# Altium PCB V2_Slit_Lamp_PCB.PcbDoc (part 1 of 2)
Units mm, origin at the board's own origin, x right, y up, seen from the top; angles counter-clockwise.
Board outline 40 x 62 mm, 2 copper layers (Top, Bottom); 34 components, 34 nets, 166 pads, 7 vias.
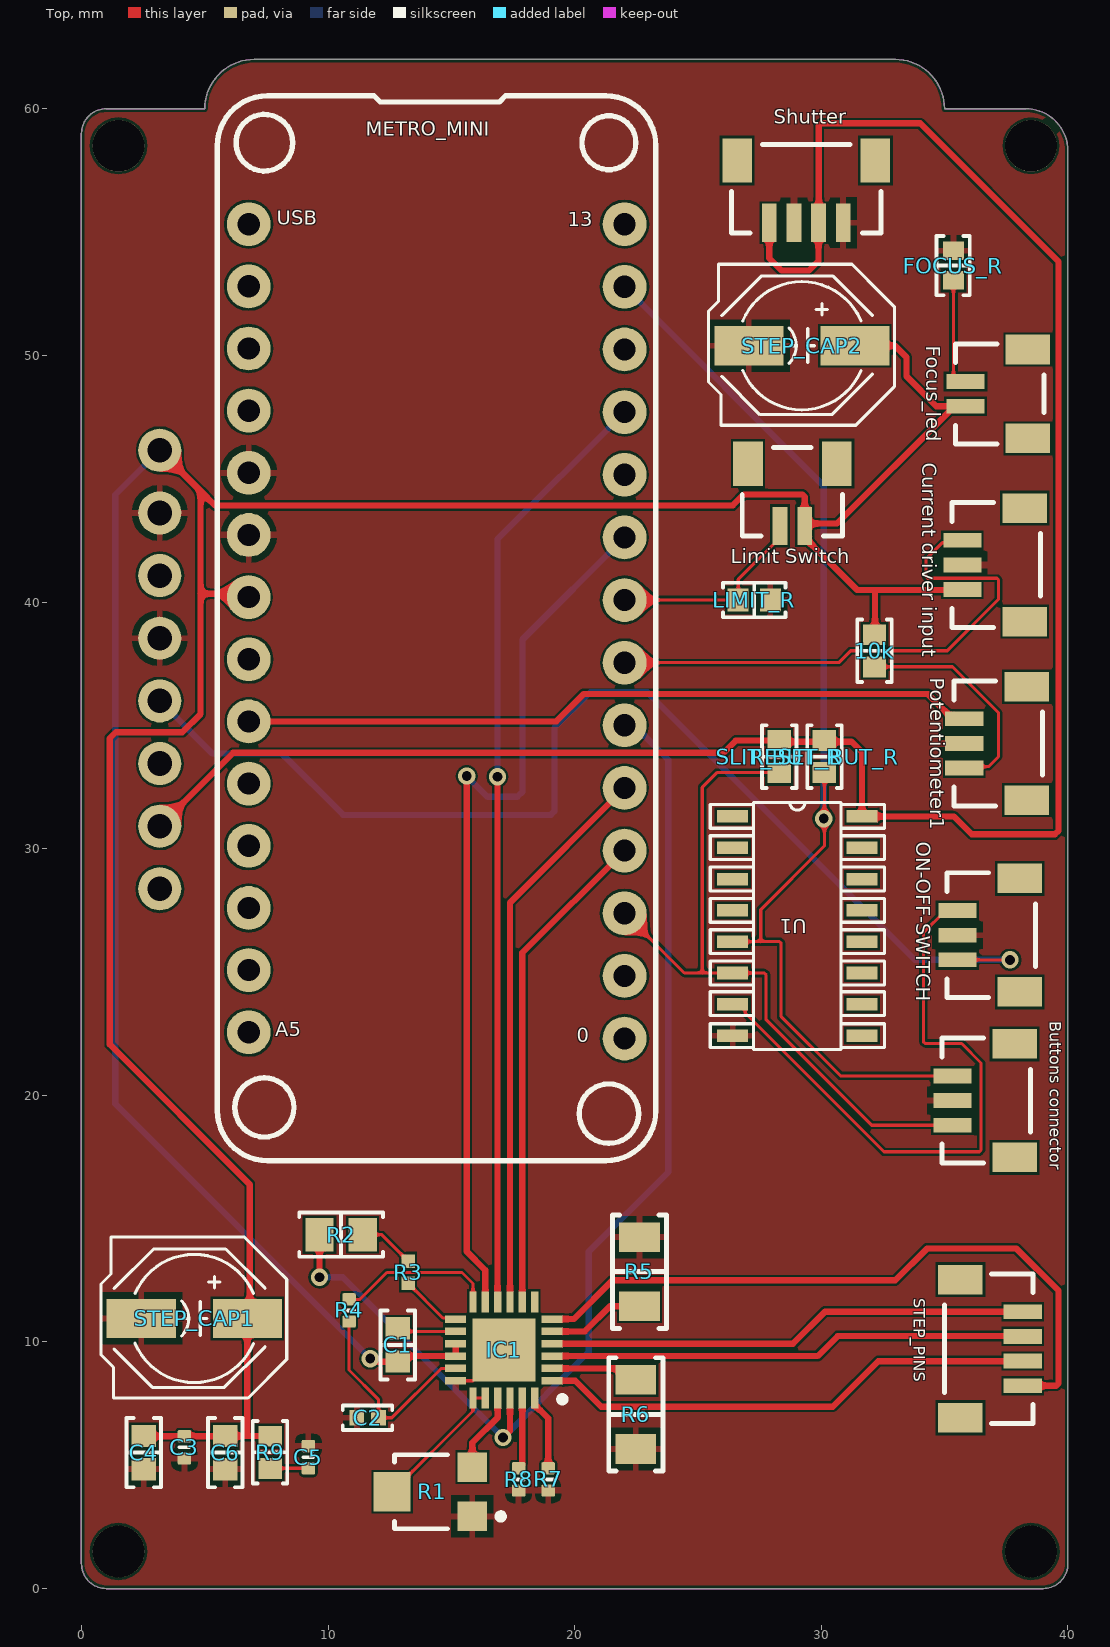
[diagram p0: Top view]
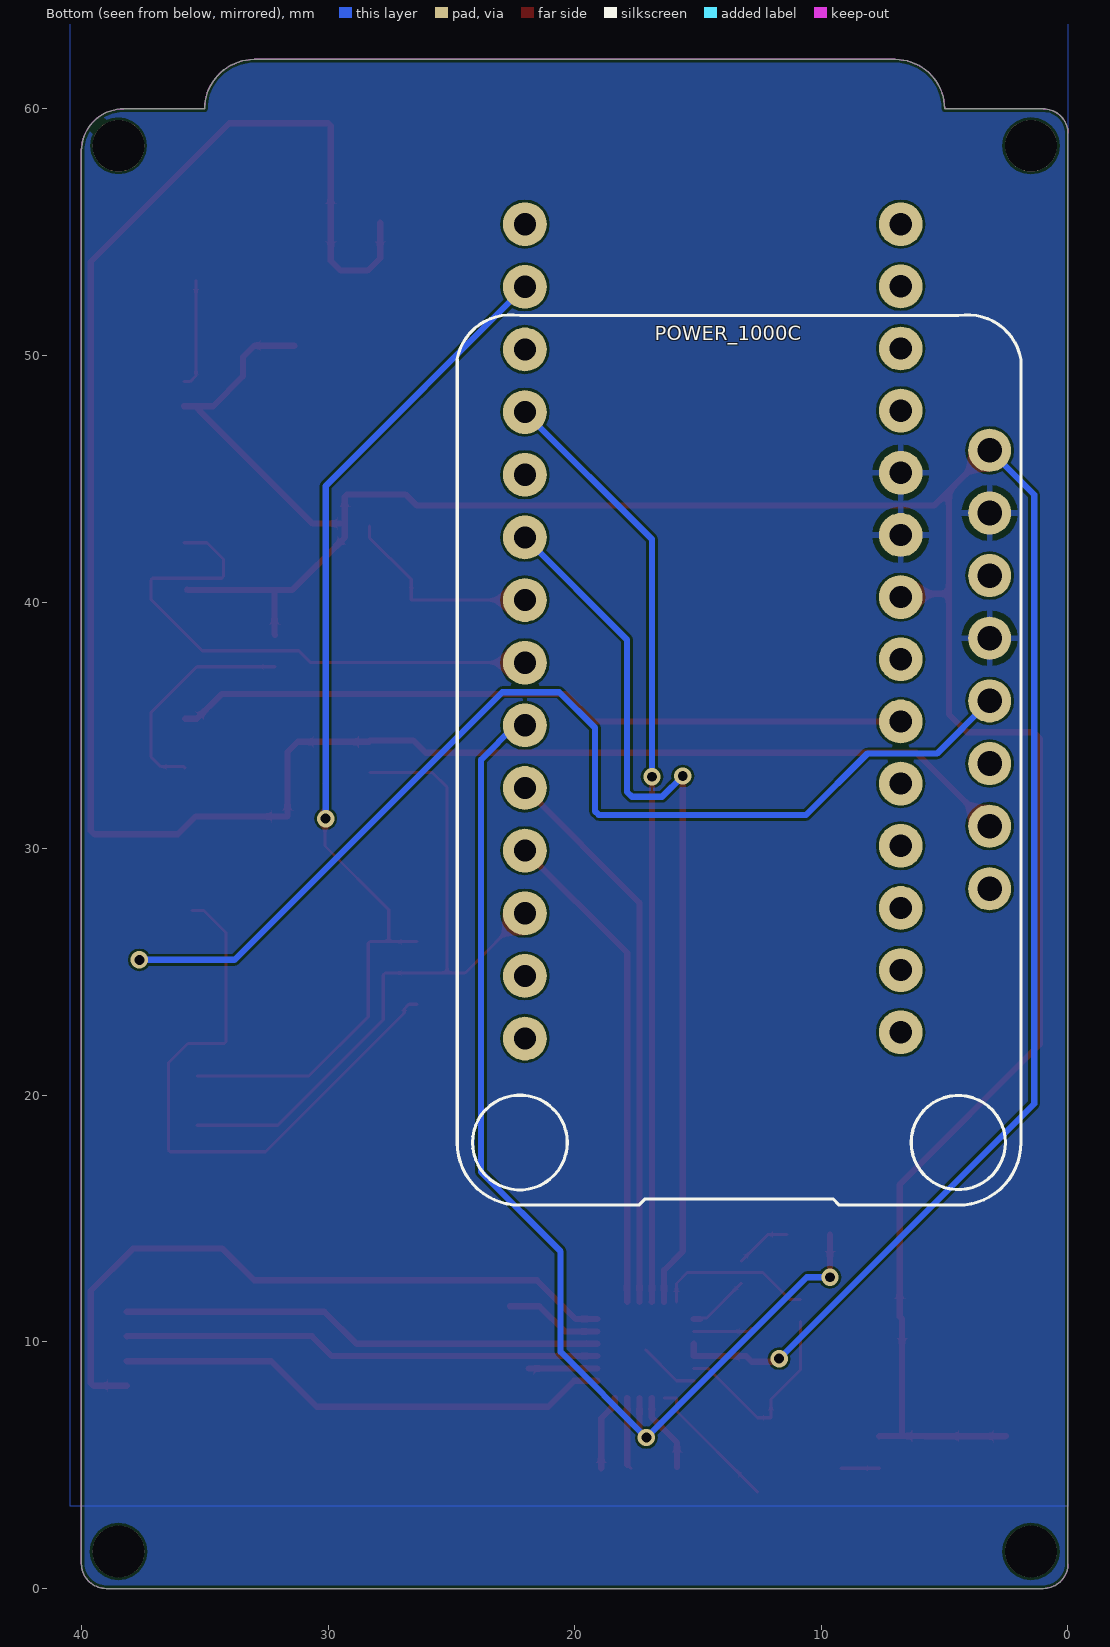
[diagram p1: Bottom view, seen from below]

## Layer stack, top to bottom
Top Solder: solder mask 0.0102, Solder Resist, Dk 3.5
Top: signal copper 0.0356
Dielectric 1: dielectric 0.32, FR-4, Dk 4.5
Bottom: signal copper 0.0356
Bottom Solder: solder mask 0.0102, Solder Resist, Dk 3.5

## Board outline
7,62 ccw(c7,60) 5,60 1,60 ccw(c1,59) 0,59 0,1 ccw(c1,1) 1,0 39,0 ccw(c39,1) 40,1 40,58.293 ccw(c38.293,58.293) 38.293,60 35,60 ccw(c33,60) 33,62

## Design rules (kind name [scope] priority, off if disabled: settings)
BoardOutlineClearance mdCopperDimension [All] p1: gap=0.127 ignorepadtopadclearanceinfootprint=FALSE
Clearance "Clearance (Same Net)" [All] p1: gap=0.1 ignorepadtopadclearanceinfootprint=FALSE
Clearance [All] p2: gap=0.1 ignorepadtopadclearanceinfootprint=FALSE
HoleSize HoleSize_Pad [IsPad] p1: absolutevalues=TRUE maxlimit=6.35 minlimit=0.7 maxpercent=80.000 minpercent=20.000
HoleSize HoleSize_Via [IsVia] p2: absolutevalues=TRUE maxlimit=6.3 minlimit=0.3 maxpercent=80.000 minpercent=20.000
HoleSize HoleSize_For_NetClass_POWER [InNetClass('POWER')] p3: absolutevalues=TRUE maxlimit=0 minlimit=0 maxpercent=80.000 minpercent=20.000
HoleToHoleClearance Same_Net [InNet(ALL)] p1: gap=0.254 allowstackedmicrovias=TRUE
MinimumAnnularRing MinimumAnnularRing_PTH [InDrillLayerPair('Top - Bottom')] p1: minimumring=0.13
MinimumAnnularRing [All] p2: minimumring=0.13
MinimumSolderMaskSliver [All] p1: minsoldermaskwidth=0
PasteMaskExpansion mlMinCreamFrame [All] p1: expansion=0
PolygonConnect PolygonConnect_For_PolygonThermal_ON_Width60000_Gap100000 [InPolygonClass('PolygonThermal_ON_Width60000_Gap100000') vs Not IsVia] p1: connectstyle=Relief reliefconductorwidth=0.152 reliefentries=4 polygonreliefangle="90 Angle" airgapwidth=0.254
PolygonConnect PolygonConnect_For_PolygonThermal_ON_Width393700_Gap100000 [InPolygonClass('PolygonThermal_ON_Width393700_Gap100000') vs Not IsVia] p2: connectstyle=Relief reliefconductorwidth=1 reliefentries=4 polygonreliefangle="90 Angle" airgapwidth=0.254
PolygonConnect ThermalVias [IsVia] p3: connectstyle=Direct reliefconductorwidth=0.254 reliefentries=4 polygonreliefangle="90 Angle" airgapwidth=0.254
PolygonConnect [All] p4: connectstyle=Relief reliefconductorwidth=0.254 reliefentries=4 polygonreliefangle="90 Angle" airgapwidth=0.254
RoutingVias [All] p1: holewidth=0.305 width=0.457 viastyle="Through Hole" minholewidth=0.305 minwidth=0.457 maxholewidth=2.54 maxwidth=2.54
SilkToSilkClearance [All] p1: silktosilkclearance=0.1
SilkToSolderMaskClearance [IsPad] p1: minsilkscreentomaskgap=0 clearancetoexposedcopper=FALSE
SolderMaskExpansion mlMinStopFrame [All] p1: expansion=0.064 istentingtop=FALSE
UnRoutedNet [All] p1: checkbadconnections=TRUE
Width Width_For_NetClass_POWER [InNetClass('POWER')] p1: maxlimit=0.254 minlimit=0.127 preferedwidth=0.254
Width [All] p2: maxlimit=254 minlimit=0.127 preferedwidth=0.127
23 further rules are at their usual default settings.

## Classes and differential pairs
component class Designator: C1 C2 C3 C4 C5 C6 IC1 R1 R2 R3 R4 R5 R6 R7 R8 R9
component class Slit_Lamp_Schematic: 10k "Buttons connector" CUR_DRIVE_OUTPUT? "Current driver input" Focus_led FOCUS_R "Limit Switch" LIMIT_R LIMIT_R? METRO_MINI MOSFET_R? ON-OFF-SWITCH Potentiometer1 POWER_1000C RESET_BUT_R Shutter SLIT_BUT_R STEP_CAP1 STEP_CAP2 STEP_PINS STEP_PINS? U1

## Components (designator, comment, footprint, x,y, rotation, side; value= is the part's Value field where it differs from the comment)
10k "10K" "RES 0603_1608" 32.156,38.024 r90 top value=10k
"Buttons connector" "Conn_JST_BM03B-SRSS-TB_LF_SN_eec" "JST BM03B-SRSS-TB" 36.576,19.787 r270 top locked
C1 "0.01uF" "CAP 0603_1608" 12.825,9.875 r90 top value=10n
C2 "0402YD475MAT2A" "CAP 0402_1005" 11.6,6.925 r180 top value=4.7u
C3 "Capacitor 10µF +/-40% 6.3V 0402" CAPC0402(1005)60_L 4.175,5.725 r270 top value=10µF
C4 "TDK CGA3E2X7R1H104K080AA" "CAP 0603_1608" 2.526,5.512 r270 top
C5 "Capacitor 10µF +/-40% 6.3V 0402" CAPC0402(1005)60_L 9.2,5.325 r90 top value=10µF
C6 "TDK CGA3E2X7R1H104K080AA" "CAP 0603_1608" 5.828,5.512 r270 top
"Current driver input" "Conn_JST_BM03B-SRSS-TB_LF_SN_eec" "JST BM03B-SRSS-TB" 36.982,41.504 r270 top locked
Focus_led "JST BM02B-SRSS-TB(LF)(SN)" "JST BM02B-SRSS-TB" 37.109,48.438 r270 top locked
FOCUS_R "1M" "RES 0603_1608 RF" 35.357,53.645 r90 top value=1Meg
IC1 "DRV8834RGET" QFN50P400X400X100-25N-D 17.125,9.675 r180 top
"Limit Switch" "JST BM02B-SRSS-TB(LF)(SN)" "JST BM02B-SRSS-TB" 28.825,44.35 r0 top
LIMIT_R "10K" "RES 0603_1608" 27.28,40.081 r180 top value=10k
METRO_MINI "ADAFRUIT_METRO_MINI" ADAFRUIT_METRO_MINI 14.402,38.938 r270 top locked
ON-OFF-SWITCH "JST BM03B-SRSS-TB(LF)(SN)" "JST BM03B-SRSS-TB" 36.779,26.492 r270 top locked
Potentiometer1 "Conn_JST_BM03B-SRSS-TB_LF_SN_eec" "JST BM03B-SRSS-TB" 37.059,34.265 r270 top locked
POWER_1000C "ADAFRUIT_POWER_BOOST" ADAFRUIT_POWER_BOOST_1000C 12.7,32.118 r90 bottom locked
R1 "35WR10KLFTR" BI-35WR10KLFTR-3_V 14.25,3.925 r180 top value=10k
R2 "10k ohm" "RES 0805_2012" 10.525,14.35 r0 top
R3 "CRCW04021K50FKED" RESC1005X40X25NL05T05 13.25,12.825 r90 top
R4 "Resistor 47K5 +/-1 % 0402 63 mW" RESC0402(1005)_L 10.85,11.275 r90 top value=47.5k
R5 "0.1 ohm" "RES 1206_3216" 22.625,12.85 r270 top value=0.1
R6 "0.1 ohm" "RES 1206_3216" 22.479,7.058 r90 top value=0.1
R7 "Resistor 47K5 +/-1 % 0402 63 mW" RESC0402(1005)_L 18.925,4.425 r270 top value=47.5k
R8 "Resistor 47K5 +/-1 % 0402 63 mW" RESC0402(1005)_L 17.725,4.425 r270 top value=47.5k
R9 "1 ohm" "RES 0603_1608" 7.65,5.525 r270 top value=1
RESET_BUT_R "10K" "RES 0603_1608" 30.124,33.731 r270 top value=10k
Shutter "BM04B-SRSS" "JST BM04B-SRSS-TB" 29.388,56.639 r0 top
SLIT_BUT_R "10K" "RES 0603_1608" 28.296,33.731 r90 top value=10k
STEP_CAP1 "Panasonic EEEFK1C101P" Step_Capacitor 4.575,10.95 r0 top
STEP_CAP2 "Panasonic EEEFK1C101P" Step_Capacitor 29.21,50.394 r0 top
STEP_PINS "BM04B-SRSS" "JST BM04B-SRSS-TB" 36.9,9.725 r90 top
U1 "SN74LS279ADR" D16-L 29.027,26.864 r0 top locked

## Footprints (in the part's own frame and the unit in brackets; to place one, negate y for a bottom-side part, rotate by r counter-clockwise, add the part's x,y. Pads: shape width x height; smd on the part's side, far side on the other; paste and mask are expansions set on the pad)
ADAFRUIT_METRO_MINI [mil]
  round 70 / inner round 60 / far side round 70 hole 35.43: 0(655,300) 1(555,300) 2(455,300) 3(355,300) 3V(-446.54,-300) 4(255,300) 5(155,300) 5V(-347.31,-300) 6(55,300) 7(-45,300) 8(-145,300) 9(-245,300) 10(-345,300) 11(-445,300) 12(-545,300) 13(-645,300) A0(148.84,-300) A1(248.08,-300) A2(347.31,-300) A3(446.54,-300) A4(545.77,-300) A5(645,-300) AREF(49.61,-300) GND(-248.08,-300) GND(-148.85,-300) RST(-545.77,-300) USB(-645,-300) VIN(-49.62,-300)
  silkscreen extent -850,-350 850,350, body extent -856,-347 829,351, height 358
ADAFRUIT_POWER_BOOST_1000C [mm]
  round 1.75 / inner round 1.524 / far side round 1.75 hole 1: 5V(14.034,-9.525) EN(3.873,-9.525) GND(6.413,-9.525) GND(11.493,-9.525) LB0(8.954,-9.525) USB(-3.747,-9.525) VBAT(-1.207,-9.525) VS(1.333,-9.525)
  silkscreen extent -16.57,-10.8 19.53,12.07, body extent -17.08,-10.79 19.55,12.07, height 10.96
BI-35WR10KLFTR-3_V [mm] "SMD, 3-Leads, Body 3x3.1mm"
  rect 1.2x1.2 smd: 1(-1.6,1) 3(-1.6,-1)
  rect 1.5x1.6 smd: 2(1.65,0)
  silkscreen extent -2.88,-1.5 1.55,1.5, body extent -1.55,-1.5 1.55,1.5, height 1.8
"CAP 0402_1005" [mm] "Chip Capacitor, 2-Leads, Body 1.02x0.51mm, IPC Medium Density"
  rect 0.6x0.64 smd: 1(-0.44,0) 2(0.44,0)
  silkscreen extent -1,-0.5 1,0.5, body extent -0.5,-0.26 0.5,0.26, height 0.52
"CAP 0603_1608" [mm] "Chip Capacitor, 2-Leads, Body 1.60x0.80mm, IPC Medium Density"
  rect 0.9x1 smd: 1(-0.675,0) 2(0.675,0)
  silkscreen extent -1.4,-0.7 1.4,0.7, body extent -0.8,-0.41 0.8,0.41, height 0.82
CAPC0402(1005)60_L [mm] "Chip Capacitor, Body 1.0x0.5mm, Height 0.6mm, IPC High Density"
  rrect25% 0.5x0.55 smd: 1(-0.45,0) 2(0.45,0)
  silkscreen extent 0,-0.2 0,0.2, body extent -0.5,-0.25 0.5,0.25, height 0.6
D16-L [mil]
  rect 49.5x20 smd: 1(-103.25,175) 2(-103.25,125) 3(-103.25,75) 4(-103.25,25) 5(-103.25,-25) 6(-103.25,-75) 7(-103.25,-125) 8(-103.25,-175) 9(103.25,-175) 10(103.25,-125) 11(103.25,-75) 12(103.25,-25) 13(103.25,25) 14(103.25,75) 15(103.25,125) 16(103.25,175)
  silkscreen extent -139,-197 139,197, body extent -117,-195 120,195, height 55
"JST BM02B-SRSS-TB" [mm] "1.0mm pitch/Disconnectable Crimp style connector"
  rect 0.6x1.55 smd: 1(-0.5,-1.262) 2(0.5,-1.262)
  rect 1.2x1.8 smd: M(-1.8,1.262) M(1.8,1.262)
  silkscreen extent -2.03,-1.68 2.03,1.91, body extent -2,-1.69 2,1.91, height 4.32
"JST BM03B-SRSS-TB" [mm] "1.0mm pitch/Disconnectable Crimp style connector"
  rect 0.6x1.55 smd: 1(-1,-1.262) 2(0,-1.262) 3(1,-1.262)
  rect 1.2x1.8 smd: M(-2.3,1.262) M(2.3,1.262)
  silkscreen extent -2.53,-1.68 2.53,1.91, body extent -2.5,-1.69 2.5,1.91, height 4.32
"JST BM04B-SRSS-TB" [mm] "1.0mm pitch/Disconnectable Crimp style connector"
  rect 0.6x1.55 smd: 1(-1.5,-1.262) 2(-0.5,-1.262) 3(0.5,-1.262) 4(1.5,-1.262)
  rect 1.2x1.8 smd: M(-2.8,1.262) M(2.8,1.262)
  silkscreen extent -3.03,-1.68 3.03,1.91, body extent -3,-1.69 3,1.91, height 4.32
QFN50P400X400X100-25N-D [mm]
  rect 0.85x0.3 smd: 1(-1.95,1.25) 2(-1.95,0.75) 3(-1.95,0.25) 4(-1.95,-0.25) 5(-1.95,-0.75) 6(-1.95,-1.25) 13(1.95,-1.25) 14(1.95,-0.75) 15(1.95,-0.25) 16(1.95,0.25) 17(1.95,0.75) 18(1.95,1.25)
  rect 0.3x0.85 smd: 7(-1.25,-1.95) 8(-0.75,-1.95) 9(-0.25,-1.95) 10(0.25,-1.95) 11(0.75,-1.95) 12(1.25,-1.95) 19(1.25,1.95) 20(0.75,1.95) 21(0.25,1.95) 22(-0.25,1.95) 23(-0.75,1.95) 24(-1.25,1.95)
  rect 2.55x2.55 smd: 25(0,0)
  silkscreen extent -2.5,1.88 -2.25,2.12, body extent -2.05,-2.05 2.05,2.05, height 1
"RES 0603_1608" [mm] "Chip Resistor, 2-Leads, Body 1.60x0.80mm, IPC Medium Density"
  rect 0.85x0.95 smd: 1(-0.65,0) 2(0.65,0)
  silkscreen extent -1.27,-0.7 1.27,0.7, body extent -0.8,-0.4 0.8,0.4, height 0.45
"RES 0603_1608 RF" [mm] "Chip Resistor, 2-Leads, Body 1.60x0.80mm, IPC High Density"
  rect 0.75x0.85 smd: 1(-0.6,0) 2(0.6,0)
  silkscreen extent -1.2,-0.66 1.2,0.69, body extent -0.8,-0.4 0.8,0.4, height 0.45
"RES 0805_2012" [mm] "Chip Resistor, 2-Leads, Body 2.00x1.25mm, IPC Medium Density"
  rect 1.15x1.35 smd: 1(-0.875,0) 2(0.875,0)
  silkscreen extent -1.7,-0.9 1.7,0.9, body extent -0.95,-0.62 1.05,0.63, height 0.6
"RES 1206_3216" [mm] "Chip Resistor, 2-Leads, Body 3.13x1.55mm, IPC Medium Density"
  rect 1.2x1.65 smd: 1(-1.4,0) 2(1.4,0)
  silkscreen extent -2.3,-1.1 2.3,1.1, body extent -1.57,-0.8 1.62,0.8, height 0.6
RESC0402(1005)_L [mm] "Chip Resistor, Body 1.0x0.5mm, IPC High Density"
  rrect25% 0.5x0.55 smd: 1(-0.45,0) 2(0.45,0)
  silkscreen extent 0,-0.2 0,0.2, body extent -0.5,-0.25 0.5,0.25, height 0.3
RESC1005X40X25NL05T05 [mm] "Chip Resistor, 2-Leads, Body 1.00x0.50mm, IPC Medium Density"
  rect 0.55x0.55 smd: 1(-0.45,0) 2(0.45,0)
  body extent -0.53,-0.27 0.53,0.28, height 0.4
Step_Capacitor [mm]
  rect 2.8x1.6 smd: A(2.15,0) K(-2.15,0)
  silkscreen extent -3.78,-3.23 3.75,3.3, body extent -2.95,-2.65 2.95,2.65, height 5.41

## Part data
10k LIMIT_R RESET_BUT_R SLIT_BUT_R: library part 10KΩ_SMD-0603_1/10W-5%, "10K resistor", Manufacturer=Yageo, MPN=RC0603JR-0710KL, Supplier Part Number 1=541-10.0KHCT-ND, DATASHEET=http://www.yageo.com/documents/recent/PYu-RC_Group_51_RoHS_L_9.pdf, DeviceName=_SMD-0603_1/10W-5%, DeviceSetName=10KΩ, DIST=Digikey, DISTLINK=https://www.digikey.com/products/en?keywords=311-10KGRCT-ND, DISTPN=311-10KGRCT-ND, GateName_1=G$1, LibraryName=PiB_resistors, Supplier 1=Digi-Key, Supplier 2=Newark, Supplier Part Number 2=61M5335, SymbolName_1=RESISTOR
"Buttons connector" "Current driver input" Potentiometer1: "CONN 3 Positions Header, Shrouded Connector 0.039\" (1.00mm) Surface Mount Tin", Digikey Part Number=455-1789-1-ND, Manufacturer=JST, Package=HDR03, Temperature="-25°C to +85°C", Temperature Range High=+85°C, Temperature Range Low=-25°C, ComponentLink1Description=Upverter, ComponentLink1URL=https://upverter.com/upn/revision/3446d17d68d15384/, ComponentLink2Description=Datasheet, ComponentLink2URL=http://www.jst-mfg.com/product/pdf/eng/eSH.pdf, Digikey Description="CONN 3 Positions Header, Shrouded Connector 0.039\" (1.00mm) Surface Mount Tin", helpURL=https://upverter.com/upn/revision/3446d17d68d15384/, Lead Free=yes, Price=0.389468695823, RoHS=TRUE, Supplier 1=Digi-Key, Supplier 2=Arrow, Supplier Part Number 1=455-1789-1-ND, Supplier Part Number 2=BM03B-SRSS-TB(LF)(SN)
  "Buttons connector": BM03B-SRSS-TB(LF)(SN)="Reset Button-Slit Button"
C1: library part 06031C103K4T2A, "Capacitor 0.01uF / 06031C103K4T2A", Manufacturer_Name=AVX, Mouser Part Number=581-06031C103K4T2A, Supplier Part Number 1=478-9371-1-ND, Arrow Part Number=06031C103K4T2A, Arrow Price/Stock=https://www.arrow.com/en/products/06031c103k4t2a/avx, Datasheet Link=http://www.mouser.com/catalog/supplier/library/pdf/AVXSurfaceMountCeramic.pdf, Height=0.9mm, MANUFACTURER_PART_NUMBER=06031C103K4T2A, Mouser Price/Stock=https://www.mouser.com/Search/Refine.aspx?Keyword=581-06031C103K4T2A, Supplier 1=Digi-Key, Supplier 2=Newark, Supplier Part Number 2=38AH3523
C2: "Ceramic Capacitor, Multilayer, Ceramic, 6.3V, 20% +Tol, 20% -Tol, X5R, 15% TC, 4.7uF, Surface Mount, 0402", Capacitance=4.7uF, Case Code (Imperial)=0402, Case Code (Metric)=1005, Dielectric=X5R, Manufacturer=AVX, Manufacturer 1=Murata, Manufacturer Part Number 1=GRM155R60J475ME47D, Max Operating Temperature=85°C, Min Operating Temperature=-55°C, Mouser Part Number=581-0402YD475MAT2A, Package Quantity=10000, Tolerance=20%, Voltage=6.3V, Arrow Part Number=0402YD475MAT2A, Case/Package=0402, Category="Ceramic Capacitors", ComponentLink1Description=https://datasheet.ciiva.com:443/pdfs/VipMasterIC/IC/MURE/MURE-S-A0008911298/MURE-S-A0008911388-1.pdf?src-supplier=IHS+Markit, ComponentLink1URL=https://datasheet.ciiva.com:443/pdfs/VipMasterIC/IC/MURE/MURE-S-A0008911298/MURE-S-A0008911388-1.pdf?src-supplier=IHS+Markit, ComponentLink2Description=https://datasheet.ciiva.com/6270/product-6270483.pdf?src-supplier=Digi-Key, ComponentLink2URL=https://datasheet.ciiva.com/6270/product-6270483.pdf?src-supplier=Digi-Key, ComponentLink3Description=https://datasheet.ciiva.com/6268/partnumbering-e-01-6268378.pdf?src-supplier=Digi-Key, ComponentLink3URL=https://datasheet.ciiva.com/6268/partnumbering-e-01-6268378.pdf?src-supplier=Digi-Key, ComponentLink4Description=https://datasheet.ciiva.com/46418/1769893-46418044.pdf?src-supplier=Element14, ComponentLink4URL=https://datasheet.ciiva.com/46418/1769893-46418044.pdf?src-supplier=Element14, ComponentLink5Description=https://datasheet.ciiva.com/46418/1769893-46418045.pdf?src-supplier=Element14, ComponentLink5URL=https://datasheet.ciiva.com/46418/1769893-46418045.pdf?src-supplier=Element14, ComponentLink6Description=https://datasheet.ciiva.com/6268/partnumbering-e-01-6268382.pdf?src-supplier=Digi-Key, ComponentLink6URL=https://datasheet.ciiva.com/6268/partnumbering-e-01-6268382.pdf?src-supplier=Digi-Key, Contact Plating=Tin, Datasheet Link=http://www.mouser.com/catalog/supplier/library/pdf/AVXSurfaceMountCeramic.pdf, Depth=0.5mm, Height=0.56mm, Lead Free="Lead Free", Length=1mm, Manufacturer Part Number=0402YD475MAT2A, Mount="Surface Mount", Mouser Price/Stock=https://www.mouser.co.uk/ProductDetail/AVX/0402YD475MAT2A?qs=s6nfgz3miVxwCmHE9M6tUg%3D%3D, Packaging="Tape and Reel", Pricing 3="1=0.09380, 10=0.07840, 25=0.07770, 100=0.05870, 250=0.04460, 500=0.03180, 1000=0.02760, 3000=0.02540 (USD)", REACH SVHC="No SVHC", RoHS=Yes, Stock 3=138, Supplier 1=Arrow, Supplier 2="Future Electronics", Supplier Part Number 1=GRM155R60J475ME47D, Supplier Part Number 2=0402YD475MAT2A-CUTT, Termination=SMD/SMT, Thickness=0.022inch, Voltage Rating=6.3V, Voltage Rating (DC)=6.3V, Weight=0.000212oz, Width=0.02inch
C3 C5: library part CMP-001-00074-2, "Chip Capacitor, 10µF +/-40%, 6.3V, 0402, Thickness 0.6 mm", Capacitance=10uF, Case Code (Imperial)=0402, Case Code (Metric)=1005, Dielectric=X5R, Manufacturer 1=Samsung, Manufacturer Part Number 1=CL05A106MP5NUNC, Max Operating Temperature=85°C, Min Operating Temperature=-55°C, Package Quantity=1, Supplier Part Number 1=1276-1450-1-ND, Tolerance=10%, Voltage Rating=6.3V, Case/Package=0402, Category="Ceramic Capacitors", ComponentLink1Description=https://datasheet.ciiva.com:443/pdfs/VipMasterIC/IC/SEMS/SEMS-S-A0008384515/SEMS-S-A0008872829-1.pdf?src-supplier=IHS+Markit, ComponentLink1URL=https://datasheet.ciiva.com:443/pdfs/VipMasterIC/IC/SEMS/SEMS-S-A0008384515/SEMS-S-A0008872829-1.pdf?src-supplier=IHS+Markit, ComponentLink2Description=https://datasheet.ciiva.com/25721/cl05a106mp5nunc-25721584.pdf?src-supplier=Digi-Key, ComponentLink2URL=https://datasheet.ciiva.com/25721/cl05a106mp5nunc-25721584.pdf?src-supplier=Digi-Key, ComponentLink3Description=https://datasheet.ciiva.com/26838/getdatasheetpartid-745310-26838170.pdf?src-supplier=Verical, ComponentLink3URL=https://datasheet.ciiva.com/26838/getdatasheetpartid-745310-26838170.pdf?src-supplier=Verical, Contact Plating=Tin, Depth=0.5mm, Lead Free="Lead Free", Length=1mm, Mount="Surface Mount", Mounting Technology=SMT, Packaging="Tape and Reel", Pins=2, Pricing 1="1=0.22000, 10=0.14900, 50=0.08920, 100=0.07540, 500=0.05156, 1000=0.04562, 2500=0.04363, 5000=0.03967 (USD)", Radiation Hardening=No, RoHS=Yes, Stock 1=40, Supplier 1=Digi-Key, Termination=Wraparound, Thickness=0.028inch, Width=0.02inch
C4 C6: library part 06031C103K4T2A, "Ceramic Capacitor, Multilayer, Ceramic, 50V, 10% +Tol, 10% -Tol, X7R, 15% TC, 0.1uF, Surface Mount, 0603", Capacitance=100nF, Case Code (Imperial)=0603, Case Code (Metric)=1608, Dielectric=X7R, Manufacturer 1=TDK, Manufacturer Part Number 1=CGA3E2X7R1H104K080AA, Max Operating Temperature=125°C, Min Operating Temperature=-55°C, Package Quantity=1, Ratings=AEC-Q200, Supplier Part Number 1=445-5666-1-ND, Tolerance=10%, Voltage=50V, Case/Package=0603, Category="Ceramic Capacitors", ComponentLink1Description=https://datasheet.ciiva.com:443/pdfs/VipMasterIC/IC/AVXC/AVXC-S-A0009957027/AVXC-S-A0009957027-1.pdf?src-supplier=IHS+Markit, ComponentLink1URL=https://datasheet.ciiva.com:443/pdfs/VipMasterIC/IC/AVXC/AVXC-S-A0009957027/AVXC-S-A0009957027-1.pdf?src-supplier=IHS+Markit, ComponentLink2Description=https://datasheet.ciiva.com/7855/88813-7855192.pdf?src-supplier=Element14, ComponentLink2URL=https://datasheet.ciiva.com/7855/88813-7855192.pdf?src-supplier=Element14, ComponentLink3Description=https://datasheet.ciiva.com/17490/skycap-sr-17490713.pdf?src-supplier=Avnet+Europe, ComponentLink3URL=https://datasheet.ciiva.com/17490/skycap-sr-17490713.pdf?src-supplier=Avnet+Europe, ComponentLink4Description=https://datasheet.ciiva.com/11508/cauto-11508203.pdf?src-supplier=Avnet, ComponentLink4URL=https://datasheet.ciiva.com/11508/cauto-11508203.pdf?src-supplier=Avnet, ComponentLink5Description=https://datasheet.ciiva.com/46393/681197-46393435.pdf?src-supplier=Element14, ComponentLink5URL=https://datasheet.ciiva.com/46393/681197-46393435.pdf?src-supplier=Element14, ComponentLink6Description=https://datasheet.ciiva.com/45259/cauto-45259484.pdf?src-supplier=Digi-Key, ComponentLink6URL=https://datasheet.ciiva.com/45259/cauto-45259484.pdf?src-supplier=Digi-Key, ComponentLink7Description=https://datasheet.ciiva.com/15212/getdatasheetpartid-560212-15212173.pdf?src-supplier=Verical, ComponentLink7URL=https://datasheet.ciiva.com/15212/getdatasheetpartid-560212-15212173.pdf?src-supplier=Verical, ComponentLink8Description=https://datasheet.ciiva.com:443/pdfs/VipMasterIC/IC/TDKC/TDKC-S-A0008953915/TDKC-S-A0008953915-1.pdf?src-supplier=IHS+Markit, ComponentLink8URL=https://datasheet.ciiva.com:443/pdfs/VipMasterIC/IC/TDKC/TDKC-S-A0008953915/TDKC-S-A0008953915-1.pdf?src-supplier=IHS+Markit, ComponentLink9Description=https://datasheet.ciiva.com/24216/cga3e2x7r1h104k080aa-266291-24216208.pdf?src-supplier=Mouser, ComponentLink9URL=https://datasheet.ciiva.com/24216/cga3e2x7r1h104k080aa-266291-24216208.pdf?src-supplier=Mouser, ComponentLink10Description=https://datasheet.ciiva.com/15192/getdatasheetpartid-715867-15192412.pdf?src-supplier=Verical, ComponentLink10URL=https://datasheet.ciiva.com/15192/getdatasheetpartid-715867-15192412.pdf?src-supplier=Verical, ComponentLink11Description=https://datasheet.ciiva.com/23803/1936565-23803084.pdf?src-supplier=Newark, ComponentLink11URL=https://datasheet.ciiva.com/23803/1936565-23803084.pdf?src-supplier=Newark, ComponentLink12Description=https://datasheet.ciiva.com/46385/1735392-46385708.pdf?src-supplier=Element14, ComponentLink12URL=https://datasheet.ciiva.com/46385/1735392-46385708.pdf?src-supplier=Element14, ComponentLink13Description=https://datasheet.ciiva.com/16500/mlccspec-automotive-general-midvoltage-en-16500693.pdf?src-supplier=Future+Electronics, ComponentLink13URL=https://datasheet.ciiva.com/16500/mlccspec-automotive-general-midvoltage-en-16500693.pdf?src-supplier=Future+Electronics, ComponentLink14Description=https://datasheet.ciiva.com/22725/1735392-22725642.pdf?src-supplier=Element14, ComponentLink14URL=https://datasheet.ciiva.com/22725/1735392-22725642.pdf?src-supplier=Element14, Composition=Ceramic, Depth=0.8mm, Height=0.8mm, Lead Free="Lead Free", Length=1.6mm, Mount="Surface Mount", Packaging="Tape and Reel", Pricing 1="1=0.10000, 10=0.07600, 50=0.04160, 100=0.03400, 500=0.02426, 1000=0.01906 (USD)", Radiation Hardening=No, REACH SVHC="No SVHC", RoHS=Yes, Stock 1=7591373, Supplier 1=Digi-Key, Supplier 2=Newark, Supplier Part Number 2=04X3156, Termination=SMD/SMT, Thickness=0.035inch, Voltage Rating=50V, Voltage Rating (DC)=50V, Weight=7.1E-05oz, Width=0.8mm
Focus_led: library part Conn_JST_BM02B-SRSS-TB_LF_SN_eec, "CONN 2 Positions Header, Shrouded Connector 0.039\" (1.00mm) Surface Mount Tin", Digikey Part Number=455-1788-1-ND, Manufacturer=JST, Package=HDR02, Temperature="-25°C to +85°C", Temperature Range High=+85°C, Temperature Range Low=-25°C, BM02B-SRSS-TB(LF)(SN)=5V-GND, ComponentLink1Description=Upverter, ComponentLink1URL=https://upverter.com/upn/revision/b9c6bdbe462de3ee/, ComponentLink2Description=Datasheet, ComponentLink2URL=http://www.jst-mfg.com/product/pdf/eng/eSH.pdf, Digikey Description="CONN 2 Positions Header, Shrouded Connector 0.039\" (1.00mm) Surface Mount Tin", helpURL=https://upverter.com/upn/revision/b9c6bdbe462de3ee/, Lead Free=yes, Price=0.331432050191, RoHS=TRUE, Supplier 1=Digi-Key, Supplier 2=Arrow, Supplier Part Number 1=455-1788-1-ND, Supplier Part Number 2=BM02B-SRSS-TB(LF)(SN)
FOCUS_R: library part RESISTOR_PTH-0207/7_1/8W-5%, "Fixed Resistor, Metal Glaze/thick Film, 0.1W, 1000000ohm, 75V, 1% +/-Tol, 100ppm/Cel, Surface Mount, 0603", Case Code (Imperial)=0603, Case Code (Metric)=1608, Manufacturer=Panasonic, Manufacturer Part Number 3=ERJ-3EKF1004V, Max Operating Temperature=155°C, Max Power Dissipation=100mW, Min Operating Temperature=-55°C, Package Quantity=1, Resistance=1MR, Supplier Part Number 1=P1.00MHCT-ND, Temperature Coefficient=100ppm/°C, Tolerance=1%, Voltage Rating=75V, Case/Package=0603, Category="Chip SMD Resistors", ComponentLink1Description=https://datasheet.ciiva.com:443/pdfs/VipMasterIC/IC/PANA/PANA-S-A0009889626/PANA-S-A0009889626-1.pdf?src-supplier=IHS+Markit, ComponentLink1URL=https://datasheet.ciiva.com:443/pdfs/VipMasterIC/IC/PANA/PANA-S-A0009889626/PANA-S-A0009889626-1.pdf?src-supplier=IHS+Markit, ComponentLink2Description=https://datasheet.ciiva.com/2432/aoa0000c304-2432473.pdf?src-supplier=Digi-Key, ComponentLink2URL=https://datasheet.ciiva.com/2432/aoa0000c304-2432473.pdf?src-supplier=Digi-Key, Composition="Thick Film", Contact Plating=Tin, CREATOR=MrSwirlyEyes, Depth=0.8mm, DeviceName=_PTH-0207/7_1/8W-5%, DeviceSetName=RESISTOR, Features="Automotive AEC-Q200", GateName_1=G$1, Height=0.022inch, Lead Free="Lead Free", Length=1.6mm, LibraryName=PiB_resistors, Manufacturer 3=Panasonic, Military Standard=Not, Mount="Surface Mount", Number of Pins=2, Number of Terminations=2, Packaging="Tape and Reel", Power Rating=100mW, Radiation Hardening=No, REACH SVHC="No SVHC", RoHS=Yes, Supplier 1=Digi-Key, Supplier 2=Newark, Supplier Part Number 2=85Y8504, SymbolName_1=RESISTOR, Termination=SMD/SMT, TESTED=YES, Voltage Rating (DC)=75V, Width=0.8mm
IC1: "Brush DC Motor Controller, 2.2A, PQCC24", Case/Package=VQFN, Collector Emitter Voltage (VCEO)=10.8V, Drain to Source Resistance=305mR, Manufacturer 2="Texas Instruments", Max Collector Current=1.5A, Max Operating Temperature=85°C, Max Supply Voltage=11V, Min Operating Temperature=-40°C, Min Supply Voltage=2.5V, Mouser Part Number=595-DRV8834RGET, Operating Supply Current=2.4mA, Package Quantity=250, Supplier Part Number 1=296-37691-1-ND, Switching Frequency=42.5kHz, Arrow Part Number=DRV8834RGET, Arrow Price/Stock=https://www.arrow.com/en/products/drv8834rget/texas-instruments, Category="Integrated Circuits (ICs)", ComponentLink1Description=https://www.ti.com:443/lit/ds/symlink/drv8834.pdf?src-supplier=IHS+Markit, ComponentLink1URL=https://www.ti.com:443/lit/ds/symlink/drv8834.pdf?src-supplier=IHS+Markit, ComponentLink2Description=https://datasheet.ciiva.com/7977/1636656-7977700.pdf?src-supplier=Element14, ComponentLink2URL=https://datasheet.ciiva.com/7977/1636656-7977700.pdf?src-supplier=Element14, ComponentLink3Description=https://datasheet.ciiva.com/30476/0900766b8119b043-30476811.pdf?src-supplier=RSComponents, ComponentLink3URL=https://datasheet.ciiva.com/30476/0900766b8119b043-30476811.pdf?src-supplier=RSComponents, ComponentLink4Description=https://datasheet.ciiva.com/15109/getdatasheetpartid-518476-15109583.pdf?src-supplier=Verical, ComponentLink4URL=https://datasheet.ciiva.com/15109/getdatasheetpartid-518476-15109583.pdf?src-supplier=Verical, ComponentLink5Description=https://datasheet.ciiva.com/14266/drv8834-14266555.pdf?src-supplier=Avnet, ComponentLink5URL=https://datasheet.ciiva.com/14266/drv8834-14266555.pdf?src-supplier=Avnet, ComponentLink6Description=https://datasheet.ciiva.com/41798/drv8834-41798879.pdf?src-supplier=Digi-Key, ComponentLink6URL=https://datasheet.ciiva.com/41798/drv8834-41798879.pdf?src-supplier=Digi-Key, Datasheet Link=http://www.ti.com/lit/ds/symlink/drv8834.pdf, Height=1mm, Interface=Parallel, Lead Free="Lead Free", Length=4.15mm, Logic Function=AND, Manufacturer Part Number 2=DRV8834RGET, Manufacturer_Name="Texas Instruments", MANUFACTURER_PART_NUMBER=DRV8834RGET, Motor Type=Stepper, Mount="Surface Mount", Mouser Price/Stock=https://www.mouser.co.uk/ProductDetail/Texas-Instruments/DRV8834RGET?qs=UFc95S4Z4CavAnnExp%2F5Mg%3D%3D, Number of Outputs=2, Number of Pins=24, Operating Supply Voltage=10.8V, Output Current=1.5A, Packaging="Tape and Reel", Pricing 2="250=1.71812, 500=1.65600, 1250=1.37655 (USD)", Radiation Hardening=No, REACH SVHC="No SVHC", RoHS=Yes, Stock 2=472, Supplier 1=Digi-Key, Supplier 2=Digi-Key, Supplier Part Number 2=296-37691-2-ND, Weight=0.001926oz, Width=4.15mm
"Limit Switch": library part Conn_JST_BM02B-SRSS-TB_LF_SN_eec, "CONN 2 Positions Header, Shrouded Connector 0.039\" (1.00mm) Surface Mount Tin", Digikey Part Number=455-1788-1-ND, Manufacturer=JST, Package=HDR02, Part Number=BM02B-SRSS-TB(LF)(SN), Temperature="-25°C to +85°C", Temperature Range High=+85°C, Temperature Range Low=-25°C, ComponentLink1Description=Upverter, ComponentLink1URL=https://upverter.com/upn/revision/b9c6bdbe462de3ee/, ComponentLink2Description=Datasheet, ComponentLink2URL=http://www.jst-mfg.com/product/pdf/eng/eSH.pdf, Digikey Description="CONN 2 Positions Header, Shrouded Connector 0.039\" (1.00mm) Surface Mount Tin", helpURL=https://upverter.com/upn/revision/b9c6bdbe462de3ee/, Lead Free=yes, Price=0.331432050191, RoHS=TRUE, Supplier 1=Digi-Key, Supplier 2=Digi-Key, Supplier Part Number 1=455-1788-1-ND, Supplier Part Number 2=455-1788-6-ND
ON-OFF-SWITCH: library part Conn_JST_BM03B-SRSS-TB_LF_SN_eec, "CONN 3 Positions Header, Shrouded Connector 0.039\" (1.00mm) Surface Mount Tin", Digikey Part Number=455-1789-1-ND, Manufacturer=JST, Package=HDR03, Part Number=BM03B-SRSS-TB(LF)(SN), Temperature="-25°C to +85°C", Temperature Range High=+85°C, Temperature Range Low=-25°C, ComponentLink1Description=Upverter, ComponentLink1URL=https://upverter.com/upn/revision/3446d17d68d15384/, ComponentLink2Description=Datasheet, ComponentLink2URL=http://www.jst-mfg.com/product/pdf/eng/eSH.pdf, Digikey Description="CONN 3 Positions Header, Shrouded Connector 0.039\" (1.00mm) Surface Mount Tin", helpURL=https://upverter.com/upn/revision/3446d17d68d15384/, Lead Free=yes, Price=0.389468695823, RoHS=TRUE, Supplier 1=Digi-Key, Supplier 2=Arrow, Supplier Part Number 1=455-1789-1-ND, Supplier Part Number 2=BM03B-SRSS-TB(LF)(SN)
POWER_1000C: Package=ADAFRUIT_POWER_BOOST_1000C, DeviceSetName=ADAFRUIT_POWER_BOOST, GateName_1=G$1, LibraryName=adafruit_power_1000c, SymbolName_1=ADAFRUIT_POWER_BOOST
R1: library part CMP-009-00041-1, "3 mm Single-Turn Open Frame Surface Mount Cermet Trimming Potentiometer, +/- 25%, 35 W, -40 to 125 degC, 3-Pin SMD, RoHS, Tape and Reel", Insulation Resistance=100MR, Manufacturer="BI Technologies", Manufacturer 1="TT BI", Max Operating Temperature=125°C, Max Power Dissipation=100mW, Min Operating Temperature=-40°C, Package Description="3-Pin Surface Mount Device, Body 3 x 3.1 mm", Package Quantity=2000, Resistance=10k, Supplier Part Number 1=987-1694-1-ND, Temperature Coefficient=250ppm/°C, Tolerance=25%, Voltage Rating=50V, Case/Package=35WR10KLFTR, Category="Variable Resistors and Potentiometers", ComponentLink1Description=https://datasheet.ciiva.com:443/pdfs/VipMasterIC/IC/TTRB/TTRB-S-A0009778036/TTRB-S-A0009778036-1.pdf?src-supplier=IHS+Markit, ComponentLink1URL=https://datasheet.ciiva.com:443/pdfs/VipMasterIC/IC/TTRB/TTRB-S-A0009778036/TTRB-S-A0009778036-1.pdf?src-supplier=IHS+Markit, ComponentLink2Description=https://datasheet.ciiva.com/8020/4701-8020822.pdf?src-supplier=Element14, ComponentLink2URL=https://datasheet.ciiva.com/8020/4701-8020822.pdf?src-supplier=Element14, ComponentLink3Description=https://datasheet.ciiva.com/7634/4701-7634923.pdf?src-supplier=Element14, ComponentLink3URL=https://datasheet.ciiva.com/7634/4701-7634923.pdf?src-supplier=Element14, ComponentLink4Description=https://datasheet.ciiva.com/26859/getdatasheetpartid-736457-26859612.pdf?src-supplier=Verical, ComponentLink4URL=https://datasheet.ciiva.com/26859/getdatasheetpartid-736457-26859612.pdf?src-supplier=Verical, ComponentLink5Description=https://datasheet.ciiva.com/22715/4701-22715102.pdf?src-supplier=Element14, ComponentLink5URL=https://datasheet.ciiva.com/22715/4701-22715102.pdf?src-supplier=Element14, Composition=Potentiometer, Datasheet URL=http://www.bitechnologies.com/pdfs/35.pdf, Datasheet Version=Feb-10, Depth=3.65mm, Lead Free="Lead Free", Length=3mm, Manufacturer Part Number 1=35WR10KLFTR, Manufacturer URL=http://www.bi-technologies.net/, Military Standard=Not, Mount="Surface Mount", Mounting Technology=SM, Number of Turns=1, Package Reference=35WR10KLFTR, Packaging=TapeandReel, Power=100mW, Power Rating=100mW, Pricing 1="1=0.38000, 10=0.35300, 25=0.31800, 50=0.30740, 100=0.29680, 250=0.27560, 500=0.25440, 1000=0.23850 (USD)", Radiation Hardening=No, REACH SVHC="No SVHC", RoHS=Yes, RoHS Compliant=True, Set Position=.5, Stock 1=6315, Supplier 1=Digi-Key, Termination=SMD/SMT, Type=Potentiometer, Voltage Rating (DC)=50V, Width=1.55mm
R2: "NTC Thermistor, 10000ohm, Surface Mount", Case Code (Imperial)=0402, Case Code (Metric)=1005, Manufacturer 2=Panasonic, Manufacturer Part Number 2=ERT-J0ER103J, Max Operating Temperature=125°C, Max Power Dissipation=66mW, Min Operating Temperature=-40°C, Package Quantity=10000, Resistance=10kR, Supplier Part Number 1=541-10.0KCCT-ND, Tolerance=5%, Accuracy=2%, Case/Package=0402, Category=Thermistors, ComponentLink1Description=https://datasheet.ciiva.com:443/pdfs/VipMasterIC/IC/PANA/PANA-S-A0009459411/PANA-S-A0009459411-1.pdf?src-supplier=IHS+Markit, ComponentLink1URL=https://datasheet.ciiva.com:443/pdfs/VipMasterIC/IC/PANA/PANA-S-A0009459411/PANA-S-A0009459411-1.pdf?src-supplier=IHS+Markit, ComponentLink2Description=https://datasheet.ciiva.com/15097/getdatasheetpartid-366429-15097813.pdf?src-supplier=Verical, ComponentLink2URL=https://datasheet.ciiva.com/15097/getdatasheetpartid-366429-15097813.pdf?src-supplier=Verical, ComponentLink3Description=https://datasheet.ciiva.com/1303/1314428-1303096.pdf?src-supplier=Farnell, ComponentLink3URL=https://datasheet.ciiva.com/1303/1314428-1303096.pdf?src-supplier=Farnell, ComponentLink4Description=https://datasheet.ciiva.com/3280/aua0000ce1-3280447.pdf?src-supplier=Avnet, ComponentLink4URL=https://datasheet.ciiva.com/3280/aua0000ce1-3280447.pdf?src-supplier=Avnet, ComponentLink5Description=https://datasheet.ciiva.com/1322/1314428-1322547.pdf?src-supplier=Element14, ComponentLink5URL=https://datasheet.ciiva.com/1322/1314428-1322547.pdf?src-supplier=Element14, ComponentLink6Description=https://datasheet.ciiva.com/24006/aua0000ce1-33779-24006229.pdf?src-supplier=Mouser, ComponentLink6URL=https://datasheet.ciiva.com/24006/aua0000ce1-33779-24006229.pdf?src-supplier=Mouser, ComponentLink7Description=https://datasheet.ciiva.com/16470/aua0000ce1-16470570.pdf?src-supplier=Avnet+Asia, ComponentLink7URL=https://datasheet.ciiva.com/16470/aua0000ce1-16470570.pdf?src-supplier=Avnet+Asia, ComponentLink8Description=https://datasheet.ciiva.com/3280/aua0000ce1-3280446.pdf?src-supplier=Avnet, ComponentLink8URL=https://datasheet.ciiva.com/3280/aua0000ce1-3280446.pdf?src-supplier=Avnet, ComponentLink9Description=https://datasheet.ciiva.com/2848/aua0000ce1-2848304.pdf?src-supplier=Digi-Key, ComponentLink9URL=https://datasheet.ciiva.com/2848/aua0000ce1-2848304.pdf?src-supplier=Digi-Key, ComponentLink10Description=https://datasheet.ciiva.com/2848/aua0000ce1-2848305.pdf?src-supplier=Digi-Key, ComponentLink10URL=https://datasheet.ciiva.com/2848/aua0000ce1-2848305.pdf?src-supplier=Digi-Key, ComponentLink11Description=https://datasheet.ciiva.com/2848/aua0000ce1-2848306.pdf?src-supplier=Digi-Key, ComponentLink11URL=https://datasheet.ciiva.com/2848/aua0000ce1-2848306.pdf?src-supplier=Digi-Key, ComponentLink12Description=https://datasheet.ciiva.com/1303/1314428-1303097.pdf?src-supplier=Farnell, ComponentLink12URL=https://datasheet.ciiva.com/1303/1314428-1303097.pdf?src-supplier=Farnell, ComponentLink13Description=https://datasheet.ciiva.com/16634/aua0000ce1-16634813.pdf?src-supplier=Avnet+Europe, ComponentLink13URL=https://datasheet.ciiva.com/16634/aua0000ce1-16634813.pdf?src-supplier=Avnet+Europe, ComponentLink14Description=https://datasheet.ciiva.com/30223/aua0000ce1-30223743.pdf?src-supplier=Onlinecomponents.com, ComponentLink14URL=https://datasheet.ciiva.com/30223/aua0000ce1-30223743.pdf?src-supplier=Onlinecomponents.com, Contact Plating=Tin, Depth=0.5mm, Lead Free="Lead Free", Length=1mm, Mount="Surface Mount", Number of Pins=2, Packaging="Tape and Reel", Power Rating=66mW, Pricing 2="1=0.08000, 10=0.06900, 25=0.06300, 50=0.05000, 100=0.04300, 250=0.04000, 500=0.03800, 1000=0.03200 (USD)", Radiation Hardening=No, RoHS=Yes, Stock 2=460, Supplier 1=Digi-Key, Supplier 2=Newark, Supplier 3=Digi-Key, Supplier Part Number 2=64AH3432, Supplier Part Number 3=P10574CT-ND, Termination=SMD/SMT, Width=500um
R3: library part CMP-2002-08297-1, Case Code (Imperial)=0402, Case Code (Metric)=1005, Manufacturer="Vishay Dale", Manufacturer 1=Vishay, Max Operating Temperature=155°C, Max Power Dissipation=63mW, Min Operating Temperature=-55°C, Package Quantity=10, Resistance=1.5kR, Supplier Part Number 1=541-1.50KLCT-ND, Temperature Coefficient=100ppm/°C, Tolerance=1%, Voltage Rating=50V, Case/Package=0402, Category="Chip SMD Resistors", ComponentLink1Description=https://datasheet.ciiva.com:443/pdfs/VipMasterIC/IC/VISH/VISH-S-A0007266705/VISH-S-A0007266705-1.pdf?src-supplier=IHS+Markit, ComponentLink1URL=https://datasheet.ciiva.com:443/pdfs/VipMasterIC/IC/VISH/VISH-S-A0007266705/VISH-S-A0007266705-1.pdf?src-supplier=IHS+Markit, ComponentLink2Description=https://datasheet.ciiva.com/11810/0900766b80d98824-11810393.pdf?src-supplier=RSComponents, ComponentLink2URL=https://datasheet.ciiva.com/11810/0900766b80d98824-11810393.pdf?src-supplier=RSComponents, ComponentLink3Description=https://datasheet.ciiva.com/2463/dcrcwe3-2463317.pdf?src-supplier=Digi-Key, ComponentLink3URL=https://datasheet.ciiva.com/2463/dcrcwe3-2463317.pdf?src-supplier=Digi-Key, ComponentLink4Description=https://datasheet.ciiva.com/2463/dcrcwe3-2463318.pdf?src-supplier=Digi-Key, ComponentLink4URL=https://datasheet.ciiva.com/2463/dcrcwe3-2463318.pdf?src-supplier=Digi-Key, ComponentLink5Description=https://datasheet.ciiva.com/26316/fld-crcw-e3-data-en-26316648.pdf?src-supplier=Distrelec, ComponentLink5URL=https://datasheet.ciiva.com/26316/fld-crcw-e3-data-en-26316648.pdf?src-supplier=Distrelec, ComponentLink6Description=https://datasheet.ciiva.com/3256/dcrcwe3-3256170.pdf?src-supplier=Avnet, ComponentLink6URL=https://datasheet.ciiva.com/3256/dcrcwe3-3256170.pdf?src-supplier=Avnet, ComponentLink7Description=https://datasheet.ciiva.com/3256/dcrcwe3-3256171.pdf?src-supplier=Avnet, ComponentLink7URL=https://datasheet.ciiva.com/3256/dcrcwe3-3256171.pdf?src-supplier=Avnet, ComponentLink8Description=https://datasheet.ciiva.com/16514/dcrcwe3-16514942.pdf?src-supplier=Avnet+Asia, ComponentLink8URL=https://datasheet.ciiva.com/16514/dcrcwe3-16514942.pdf?src-supplier=Avnet+Asia, ComponentLink9Description=https://datasheet.ciiva.com/16755/70201119-16755551.pdf?src-supplier=Allied+Electronics, ComponentLink9URL=https://datasheet.ciiva.com/16755/70201119-16755551.pdf?src-supplier=Allied+Electronics, ComponentLink10Description=https://datasheet.ciiva.com/2463/dcrcwe3-2463316.pdf?src-supplier=Digi-Key, ComponentLink10URL=https://datasheet.ciiva.com/2463/dcrcwe3-2463316.pdf?src-supplier=Digi-Key, ComponentLink11Description=https://datasheet.ciiva.com/5540/dcrcwe3-109170-5540969.pdf?src-supplier=Mouser, ComponentLink11URL=https://datasheet.ciiva.com/5540/dcrcwe3-109170-5540969.pdf?src-supplier=Mouser, Composition="Thick Film", Contact Plating=Tin, Depth=0.5mm, Features="Automotive AEC-Q200", Height=0.35mm, Lead Free="Lead Free", Length=1mm, Manufacturer Part Number 1=CRCW04021K50FKED, Military Standard=Not, Mount="Surface Mount", Number of Terminations=2, Packaging="Tape and Reel", Part Number=CRCW04021K50FKED, Power Rating=63mW, Pricing 1="1=0.10000, 10=0.03500, 100=0.01410, 1000=0.00633, 2500=0.00550, 5000=0.00454 (USD)", Radiation Hardening=No, REACH SVHC=Unknown, RoHS=Yes, Stock 1=43595, Supplier 1=Digi-Key, Supplier 2=Newark, Supplier Part Number 2=25AC6939, Termination=SMD/SMT, Voltage Rating (DC)=50V, Weight=2.3E-05oz, Width=0.02inch, Working Voltage=50V
R4: library part CMP-009-00137-2, "Chip Resistor, 47,5 kOhms, +/-1 %, 63 mW, -55 to 155 degC, 0402", Case Code (Imperial)=0402, Case Code (Metric)=1005, Manufacturer 1=Panasonic, Manufacturer 2=Vishay, Manufacturer Part Number 1=ERT-J0EP473J, Manufacturer Part Number 2=CRCW060347R0FKEA, Max Operating Temperature=155°C, Max Power Dissipation=66mW, Min Operating Temperature=-55°C, Package Quantity=10000, Power=63mW, Power Rating=100mW, Resistance=47kR, Supplier Part Number 1=P11441CT-ND, Temperature Coefficient=100ppm/°C, Tolerance=1%, Voltage Rating=75V, Accuracy=2%, Case/Package=0402, Category=Thermistors, ComponentLink1Description=https://datasheet.ciiva.com:443/pdfs/VipMasterIC/IC/PANA/PANA-S-A0009459411/PANA-S-A0009459411-1.pdf?src-supplier=IHS+Markit, ComponentLink1URL=https://datasheet.ciiva.com:443/pdfs/VipMasterIC/IC/PANA/PANA-S-A0009459411/PANA-S-A0009459411-1.pdf?src-supplier=IHS+Markit, ComponentLink2Description=https://datasheet.ciiva.com/1322/1314428-1322546.pdf?src-supplier=Element14, ComponentLink2URL=https://datasheet.ciiva.com/1322/1314428-1322546.pdf?src-supplier=Element14, ComponentLink3Description=https://datasheet.ciiva.com/1303/1314428-1303079.pdf?src-supplier=Farnell, ComponentLink3URL=https://datasheet.ciiva.com/1303/1314428-1303079.pdf?src-supplier=Farnell, ComponentLink4Description=https://datasheet.ciiva.com/1303/1314428-1303080.pdf?src-supplier=Farnell, ComponentLink4URL=https://datasheet.ciiva.com/1303/1314428-1303080.pdf?src-supplier=Farnell, ComponentLink5Description=https://datasheet.ciiva.com/26928/getdatasheetpartid-776115-26928332.pdf?src-supplier=Verical, ComponentLink5URL=https://datasheet.ciiva.com/26928/getdatasheetpartid-776115-26928332.pdf?src-supplier=Verical, ComponentLink6Description=https://datasheet.ciiva.com/3280/aua0000ce1-3280445.pdf?src-supplier=Avnet, ComponentLink6URL=https://datasheet.ciiva.com/3280/aua0000ce1-3280445.pdf?src-supplier=Avnet, ComponentLink7Description=https://datasheet.ciiva.com/2848/aua0000ce1-2848303.pdf?src-supplier=Digi-Key, ComponentLink7URL=https://datasheet.ciiva.com/2848/aua0000ce1-2848303.pdf?src-supplier=Digi-Key, ComponentLink8Description=https://datasheet.ciiva.com/16470/aua0000ce1-16470568.pdf?src-supplier=Avnet+Asia, ComponentLink8URL=https://datasheet.ciiva.com/16470/aua0000ce1-16470568.pdf?src-supplier=Avnet+Asia, ComponentLink9Description=https://datasheet.ciiva.com/2848/aua0000ce1-2848301.pdf?src-supplier=Digi-Key, ComponentLink9URL=https://datasheet.ciiva.com/2848/aua0000ce1-2848301.pdf?src-supplier=Digi-Key, ComponentLink10Description=https://datasheet.ciiva.com/2848/aua0000ce1-2848302.pdf?src-supplier=Digi-Key, ComponentLink10URL=https://datasheet.ciiva.com/2848/aua0000ce1-2848302.pdf?src-supplier=Digi-Key, ComponentLink11Description=https://datasheet.ciiva.com:443/pdfs/VipMasterIC/IC/VISH/VISH-S-A0007266705/VISH-S-A0007266705-1.pdf?src-supplier=IHS+Markit, ComponentLink11URL=https://datasheet.ciiva.com:443/pdfs/VipMasterIC/IC/VISH/VISH-S-A0007266705/VISH-S-A0007266705-1.pdf?src-supplier=IHS+Markit, ComponentLink12Description=https://datasheet.ciiva.com/11810/0900766b80d98afc-11810171.pdf?src-supplier=RSComponents, ComponentLink12URL=https://datasheet.ciiva.com/11810/0900766b80d98afc-11810171.pdf?src-supplier=RSComponents, ComponentLink13Description=https://datasheet.ciiva.com/3257/dcrcwe3-3257637.pdf?src-supplier=Avnet, ComponentLink13URL=https://datasheet.ciiva.com/3257/dcrcwe3-3257637.pdf?src-supplier=Avnet, ComponentLink14Description=https://datasheet.ciiva.com/7777/1697337-7777333.pdf?src-supplier=Element14, ComponentLink14URL=https://datasheet.ciiva.com/7777/1697337-7777333.pdf?src-supplier=Element14, ComponentLink15Description=https://datasheet.ciiva.com/22872/70201119-22872069.pdf?src-supplier=Allied+Electronics, ComponentLink15URL=https://datasheet.ciiva.com/22872/70201119-22872069.pdf?src-supplier=Allied+Electronics, ComponentLink16Description=https://datasheet.ciiva.com/7777/1697337-7777334.pdf?src-supplier=Element14, ComponentLink16URL=https://datasheet.ciiva.com/7777/1697337-7777334.pdf?src-supplier=Element14, ComponentLink17Description=https://datasheet.ciiva.com/2465/dcrcwe3-2465675.pdf?src-supplier=Digi-Key, ComponentLink17URL=https://datasheet.ciiva.com/2465/dcrcwe3-2465675.pdf?src-supplier=Digi-Key, ComponentLink18Description=https://datasheet.ciiva.com/2465/dcrcwe3-2465676.pdf?src-supplier=Digi-Key, ComponentLink18URL=https://datasheet.ciiva.com/2465/dcrcwe3-2465676.pdf?src-supplier=Digi-Key, ComponentLink19Description=https://datasheet.ciiva.com/5549/dcrcwe3-109170-5549100.pdf?src-supplier=Mouser, ComponentLink19URL=https://datasheet.ciiva.com/5549/dcrcwe3-109170-5549100.pdf?src-supplier=Mouser, ComponentLink20Description=https://datasheet.ciiva.com/16777/70201119-16777404.pdf?src-supplier=Allied+Electronics, ComponentLink20URL=https://datasheet.ciiva.com/16777/70201119-16777404.pdf?src-supplier=Allied+Electronics, ComponentLink21Description=https://datasheet.ciiva.com/22700/1697337-22700364.pdf?src-supplier=Element14, ComponentLink21URL=https://datasheet.ciiva.com/22700/1697337-22700364.pdf?src-supplier=Element14, ComponentLink22Description=https://datasheet.ciiva.com/2465/dcrcwe3-2465677.pdf?src-supplier=Digi-Key, ComponentLink22URL=https://datasheet.ciiva.com/2465/dcrcwe3-2465677.pdf?src-supplier=Digi-Key, ComponentLink23Description=https://datasheet.ciiva.com/26316/fld-crcw-e3-data-en-26316558.pdf?src-supplier=Distrelec, ComponentLink23URL=https://datasheet.ciiva.com/26316/fld-crcw-e3-data-en-26316558.pdf?src-supplier=Distrelec, Composition="Thick Film", Contact Plating=Tin, Depth=0.5mm, Features="Automotive AEC-Q200", Height=0.45mm, Lead Free="Lead Free", Length=1mm, Military Standard=Not, Mount="Surface Mount", Number of Pins=2, Number of Terminations=2, Packaging="Tape and Reel", Pins=2, Pricing 1="1=0.18000, 5=0.17400, 10=0.15400, 25=0.14200, 50=0.11360, 100=0.09740, 500=0.08524, 1000=0.07306, 5000=0.06494 (USD)", Pricing 2="1=0.10000, 10=0.03300, 100=0.01340, 1000=0.00602, 2500=0.00522 (USD)", Radiation Hardening=No, REACH SVHC=Unknown, RoHS=Yes, Stock 1=18779, Stock 2=1712, Supplier 1=Digi-Key, Supplier 2=Digi-Key, Supplier Part Number 2=541-47.0HCT-ND, Termination=SMD/SMT, Voltage Rating (DC)=75V, Weight=7.1E-05oz, Width=500um
R5 R6: library part ".1 ohm RES", "Fixed Resistor, Metal Strip, 0.25W, 0.1ohm, 1% +/-Tol, 75ppm/Cel, Surface Mount, 1206", Case Code (Imperial)=1206, Case Code (Metric)=3216, Manufacturer 1="Vishay Dale", Manufacturer Part Number 1=WSL1206R1000FEA, Max Operating Temperature=170°C, Min Operating Temperature=-65°C, Package Quantity=4000, Power Rating=250mW, Resistance=100mR, Supplier Part Number 1=26AC5227, Temperature Coefficient=75ppm/°C, Tolerance=1%, Voltage Rating=150mV, Case/Package=1206, Category="Chip SMD Resistors", ComponentLink1Description=https://datasheet.ciiva.com:443/pdfs/VipMasterIC/IC/VISH/VISH-S-A0009736187/VISH-S-A0009736187-1.pdf?src-supplier=IHS+Markit, ComponentLink1URL=https://datasheet.ciiva.com:443/pdfs/VipMasterIC/IC/VISH/VISH-S-A0009736187/VISH-S-A0009736187-1.pdf?src-supplier=IHS+Markit, ComponentLink2Description=https://datasheet.ciiva.com/46422/442550-46422266.pdf?src-supplier=Element14, ComponentLink2URL=https://datasheet.ciiva.com/46422/442550-46422266.pdf?src-supplier=Element14, ComponentLink3Description=https://datasheet.ciiva.com/8979/wsl-8979884.pdf?src-supplier=Avnet, ComponentLink3URL=https://datasheet.ciiva.com/8979/wsl-8979884.pdf?src-supplier=Avnet, ComponentLink4Description=https://datasheet.ciiva.com/17171/wsl-17171769.pdf?src-supplier=Avnet+Europe, ComponentLink4URL=https://datasheet.ciiva.com/17171/wsl-17171769.pdf?src-supplier=Avnet+Europe, ComponentLink5Description=https://datasheet.ciiva.com/46385/622543-46385258.pdf?src-supplier=Element14, ComponentLink5URL=https://datasheet.ciiva.com/46385/622543-46385258.pdf?src-supplier=Element14, ComponentLink6Description=https://datasheet.ciiva.com/46422/442550-46422267.pdf?src-supplier=Element14, ComponentLink6URL=https://datasheet.ciiva.com/46422/442550-46422267.pdf?src-supplier=Element14, ComponentLink7Description=https://datasheet.ciiva.com/16215/wsl-16215631.pdf?src-supplier=Future+Electronics, ComponentLink7URL=https://datasheet.ciiva.com/16215/wsl-16215631.pdf?src-supplier=Future+Electronics, Composition="Metal Strip", Contact Plating=Tin,Matte, Depth=1.6mm, Height=0.635mm, Lead Free="Lead Free", Length=3.2mm, Military Standard=Not, Mount="Surface Mount", Number of Pins=2, Packaging="Tape and Reel", Pricing 3="1=0.25600, 4000=0.24900, 8000=0.23700, 16000=0.23400, 24000=0.23100 (USD)", Radiation Hardening=No, REACH SVHC=Unknown, RoHS=Yes, Stock 3=28000, Supplier 1=Newark, Supplier 2=Digi-Key, Supplier Part Number 2=P.10AUDKR-ND, Termination=SMD/SMT, Weight=0.000571oz, Width=1.6mm